# EAGLE board HE6-RORO1 (EAGLE 9.6.2)

Size 58.42 x 24.13 mm. Coordinates in mm from the lower left corner, seen from the top.
Outline: 0,0 58.42,0 58.42,24.13 0,24.13 0,0
Copper layers (1*16): Top 0.035mm / dielectric 1.5mm / Bottom 0.035mm
Design rules "dirt_cheap_dirty_boards.v1.1": minimum track width 6mil, minimum drill 12mil, track to track 6mil, track to pad 6mil, pad to pad 6mil, via to via 6mil, smd to smd 0mil, copper to edge 10mil, drill to drill 10mil, minimum pad ring 10mil, minimum via ring 6mil, stop-mask expansion 2mil, vias tented up to drill 25mil, thermal gap 10mil
Net classes: 1 vcc: width 0.254 mm
tRestrict: area 0,2.5 to 6.3,20.3
bRestrict: area 0,2.5 to 6.3,20.3

## Footprints (pad centres in the part's own frame; a part is rotated, then mirrored left to right if it is on the bottom)
CAP = smd 0.8 x 1.2: 1 -0.9,0; 2 0.9,0
WS2812B = smd 1.651 x 1: 1 2.577,-1.6; 2 2.577,1.6; 3 -2.577,1.6; 4 -2.577,-1.6
DIODE = smd 1.6 x 0.8: 1 -1.7,0; 2 1.7,0
MICROBUILDER_U.FL = smd 2.2 x 1.05: 1 0,1.375; 2 0,-1.375 | smd 0.8 x 1: 3 1.525,0
1X12_NO_SILK = drill 1.016 pad 1.88: 1 0,0; 2 2.54,0; 3 5.08,0; 4 7.62,0; 5 10.16,0; 6 12.7,0; 7 15.24,0; 8 17.78,0; 9 20.32,0; 10 22.86,0; 11 25.4,0; 12 27.94,0
RES = smd 0.8 x 1.2: 1 -0.9,0; 2 0.9,0
TACTILE_SWITCH_SMD_6.0X3.5MM = smd 2.3 x 1.6: 1 -3.15,0; 2 3.15,0
RFMHCW_SMT = smd 1.5 x 1: 1P 8.1,-7; 2P 8.1,-5; 3P 8.1,-3; 4P 8.1,-1; 5P 8.1,1; 6P 8.1,3; 7P 8.1,5; 8P 8.1,7; 9P -8.1,7; 10P -8.1,5; 11P -8.1,3; 12P -8.1,1; 13P -8.1,-1; 14P -8.1,-3; 15P -8.1,-5; 16P -8.1,-7
MODULE_ESP32-WROOM-32(8MB) = smd 2 x 0.9: 1 -8.5,5.26; 2 -8.5,3.99; 3 -8.5,2.72; 4 -8.5,1.45; 5 -8.5,0.18; 6 -8.5,-1.09; 7 -8.5,-2.36; 8 -8.5,-3.63; 9 -8.5,-4.9; 10 -8.5,-6.17; 11 -8.5,-7.44; 12 -8.5,-8.71; 13 -8.5,-9.98; 14 -8.5,-11.25; 25 8.5,-11.25; 26 8.5,-9.98; 27 8.5,-8.71; 28 8.5,-7.44; 29 8.5,-6.17; 30 8.5,-4.9; 31 8.5,-3.63; 32 8.5,-2.36; 33 8.5,-1.09; 34 8.5,0.18; 35 8.5,1.45; 36 8.5,2.72; 37 8.5,3.99; 38 8.5,5.26 | smd 0.9 x 2: 15 -5.715,-12.25; 16 -4.445,-12.25; 17 -3.175,-12.25; 18 -1.905,-12.25; 19 -0.635,-12.25; 20 0.635,-12.25; 21 1.905,-12.25; 22 3.175,-12.25; 23 4.445,-12.25; 24 5.715,-12.25 | smd 5 x 5: 39 -1,-2.24

## Placement (x,y rotation side)
C2  10uF  [CAP]  55.88,1.27 0 top
C9  22uF  [CAP]  48.26,19.05 90 top
C10  100nF  [CAP]  45.72,19.05 90 top
C11  100nF  [CAP]  45.72,3.81 270 top
C12  100nF  [CAP]  48.26,13.97 0 top
D1  WS2812B  [WS2812B]  30.48,12.06 90 top
D2  MBR120  [DIODE]  55.88,11.43 270 top
IPEX  [MICROBUILDER_U.FL]  29.21,3.81 270 top
J1  [1X12_NO_SILK]  35.56,24.13 180 top
J2  [1X12_NO_SILK]  35.56,0 180 top
R1  100k  [RES]  55.88,3.81 0 top
R2  10K  [RES]  48.26,3.81 270 top
R3  100k  [RES]  53.34,11.43 90 top
R4  100k  [RES]  55.88,6.35 180 top
R5  10K  [RES]  50.8,19.05 90 top
R9  100k  [RES]  10.16,6.35 90 bottom
S1  MOMENTARY-SWITCH-SPST-SMD-6.0X3.5MM  [TACTILE_SWITCH_SMD_6.0X3.5MM]  38.1,19.05 180 top
S2  MOMENTARY-SWITCH-SPST-SMD-6.0X3.5MM  [TACTILE_SWITCH_SMD_6.0X3.5MM]  38.1,6.35 180 top
U1  [RFMHCW_SMT]  20.32,12.06 270 bottom
U3  ESP32-WROOM-32(8MB)  [MODULE_ESP32-WROOM-32(8MB)]  11.43,12.06 90 top
U$9  LERU_LOGO_9MM  [LERU_LOGO_9MM]  70.36,8.76 0 top  (outside the outline)

## Library data of the parts
C2 C9-C12 D2 R1-R5 R9 U$9 = JLR
D1 = SparkFun-LED; PROD_ID: DIO-12503
IPEX = A-3-7-1-2-80
J1 J2 = SparkFun-Connectors
S1 S2 = SparkFun-Switches; PROD_ID: SWCH-00815; SF_SKU: COM-08229
U1 = microbuilder
U3 = ESP32-WROOM-32_8MB_; AVAILABILITY: Unavailable; DESCRIPTION: Bluetooth, WiFi 802.11b/g/n, Bluetooth v4.2 + EDR, Class 1, 2 and 3 Transceiver Module 2.4GHz ~ 2.5GHz Surface Mount; MF: Espressif Systems; MP: ESP32-WROOM-32 _8MB_; PACKAGE: Module Espressif Systems; PRICE: None

## Nets
+3V3: C2.1 C9.2 C10.2 D2.1 J1.12 R2.2 R3.2 R5.2 U1.5P U3.2
BAT+: D2.2 J1.1 R4.1
BATV: R1.1 R4.2 U3.26
GND: C2.2 C9.1 C10.1 C11.1 C12.1 IPEX.1 IPEX.2 J2.4 R1.2 R9.2 U1.2P U1.9P U1.16P U3.1 U3.15 U3.38 U3.39
IO2: J2.1 U3.24
IO12: J2.5 U3.14
IO14: J2.6 U3.13
IO15: J2.3 U3.23
IO16: J1.6 U3.27
IO17: J1.7 U3.28
IO26: J2.8 U3.11
IO27: J2.7 U3.12
IO33: J2.9 U3.9
MISO: U1.10P U3.31
MOSI: U1.11P U3.37
N$1: IPEX.3 U1.1P
PGM: C12.2 R5.1 U3.25
RFM_DIO0: R9.1 U1.6P U3.8
RFM_NSS: R3.1 U1.13P U3.29
RFM_RESET: U1.14P U3.10
RST: C11.2 J2.12 R2.1 U3.3
RXD0: J1.9 U3.34
SCK: U1.12P U3.30
SCL: J1.11 U3.36
SDA: J1.8 U3.33
TXD0: J1.10 U3.35
VN: J2.10 U3.5
VP: J2.11 U3.4

## Tracks (layer width: path | path; a pad name or v marks a point on that pad's centre or on a via)
+3V3  (9 unrouted)
BAT+  (2 unrouted)
BATV  (2 unrouted)
GND  (16 unrouted)
IO2  (1 unrouted)
IO12  (1 unrouted)
IO14  (1 unrouted)
IO15  (1 unrouted)
IO16  (1 unrouted)
IO17  (1 unrouted)
IO26  (1 unrouted)
IO27  (1 unrouted)
IO33  (1 unrouted)
MISO  (1 unrouted)
MOSI  (1 unrouted)
N$1  (1 unrouted)
PGM  (2 unrouted)
RFM_DIO0  (2 unrouted)
RFM_NSS  (2 unrouted)
RFM_RESET  (1 unrouted)
RST  (3 unrouted)
RXD0  (1 unrouted)
SCK  (1 unrouted)
SCL  (1 unrouted)
SDA  (1 unrouted)
TXD0  (1 unrouted)
VN  (1 unrouted)
VP  (1 unrouted)

## Text on the board
tNames: HE6-PLINKTX101 | RAW / BAT+